# EAGLE board Biker Assignment (EAGLE 9.7.0)

Size 166.98 x 76.03 mm. Coordinates in mm from the lower left corner, seen from the top.
Outline: 0,0 166.98,0 166.98,76.03 0,76.03 0,0
Copper layers (1*16): Top 0.035mm / dielectric 1.5mm / Bottom 0.035mm
Design rules "default": minimum track width 6mil, minimum drill 0.35mm, track to track 6mil, track to pad 6mil, pad to pad 6mil, via to via 6mil, smd to smd 6mil, copper to edge 40mil, drill to drill 6mil, minimum pad ring 10mil, minimum via ring 8mil, stop-mask expansion 4mil, vias tented up to drill 0mil, thermal gap 10mil

## Footprints (pad centres in the part's own frame; a part is rotated, then mirrored left to right if it is on the bottom)
WS2812-STRIP = drill 1.016 long: 1 -3.81,0; 2 -1.27,0; 3 1.27,0; 4 3.81,0
RESAD1016W63L850D250B = drill 0.83 pad 1.43: 1 -5.08,0; 2 5.08,0
SWITCH-MOMENTARY-PTH-6.5MM = drill 1.016 pad 1.88: 1 -3.251,2.261; 2 3.251,2.261; 3 -3.251,-2.261; 4 3.251,-2.261
ARDUINO-UNO-R3-SHIELD = drill 1.016 pad 1.88: 3.3V 24.13,-2.54; 5V 24.13,0; A0 24.13,12.7; A1 24.13,15.24; A2 24.13,17.78; A3 24.13,20.32; A4 24.13,22.86; A5 24.13,25.4; AREF -24.13,-13.97; D2 -24.13,20.32; D3 -24.13,17.78; D4 -24.13,15.24; D5 -24.13,12.7; D6 -24.13,10.16; D7 -24.13,7.62; D8 -24.13,3.81; D9 -24.13,1.27; D10 -24.13,-1.27; D11 -24.13,-3.81; D12 -24.13,-6.35; D13 -24.13,-8.89; GND@0 24.13,2.54; GND@1 24.13,5.08; GND@2 -24.13,-11.43; IOREF 24.13,-7.62; NC 24.13,-10.16; RES 24.13,-5.08; RX -24.13,25.4; SCL -24.13,-19.05; SDA -24.13,-16.51; TX -24.13,22.86; VIN 24.13,7.62

## Placement (x,y rotation side)
LED1  WS2812B_STRIP  [WS2812-STRIP]  82.01,67.69 270 top
R1  10k  [RESAD1016W63L850D250B]  89.53,49.34 90 top
R2  1k  [RESAD1016W63L850D250B]  160.65,49.34 90 top
R3  10k  [RESAD1016W63L850D250B]  112.39,49.34 90 top
SBRAKES  SWITCH_MOMENTARY  [SWITCH-MOMENTARY-PTH-6.5MM]  114.93,32.83 90 top
STURN_LEFT  SWITCH_MOMENTARY  [SWITCH-MOMENTARY-PTH-6.5MM]  92.07,32.83 90 top
STURN_RIGHT  SWITCH_MOMENTARY  [SWITCH-MOMENTARY-PTH-6.5MM]  158.11,32.83 90 top
UARDUINO  ARDUINO-UNO-R3-SHIELD  [ARDUINO-UNO-R3-SHIELD]  47.88,29.84 270 top

## Library data of the parts
LED1 R1-R3 SBRAKES STURN_LEFT STURN_RIGHT UARDUINO = Tinkercad

## Nets
UARDUINO_5V: LED1.2 R1.2 R2.2 R3.2 UARDUINO.5V
UARDUINO_D2: LED1.1 UARDUINO.D2
UARDUINO_D10: R3.1 SBRAKES.1 SBRAKES.2 UARDUINO.D10
UARDUINO_D11: R1.1 STURN_LEFT.1 STURN_LEFT.2 UARDUINO.D11
UARDUINO_D12: R2.1 STURN_RIGHT.3 STURN_RIGHT.4 UARDUINO.D12
UARDUINO_GND: LED1.3 SBRAKES.3 SBRAKES.4 STURN_LEFT.3 STURN_LEFT.4 STURN_RIGHT.1 STURN_RIGHT.2 UARDUINO.GND@0 UARDUINO.GND@1 UARDUINO.GND@2

## Tracks (layer width: path | path; a pad name or v marks a point on that pad's centre or on a via)
UARDUINO_5V  (4 unrouted)
UARDUINO_D2  (1 unrouted)
UARDUINO_D10  (3 unrouted)
UARDUINO_D11  (3 unrouted)
UARDUINO_D12  (3 unrouted)
UARDUINO_GND  (9 unrouted)